# Altium PCB Samp1.PcbDoc
Units mil, origin at the board's own origin, x right, y up, seen from the top; angles counter-clockwise.
Board outline 1727.31 x 415.03 mil, 2 copper layers (Top Layer, Bottom Layer); 14 components, 10 nets, 36 pads, 0 vias.
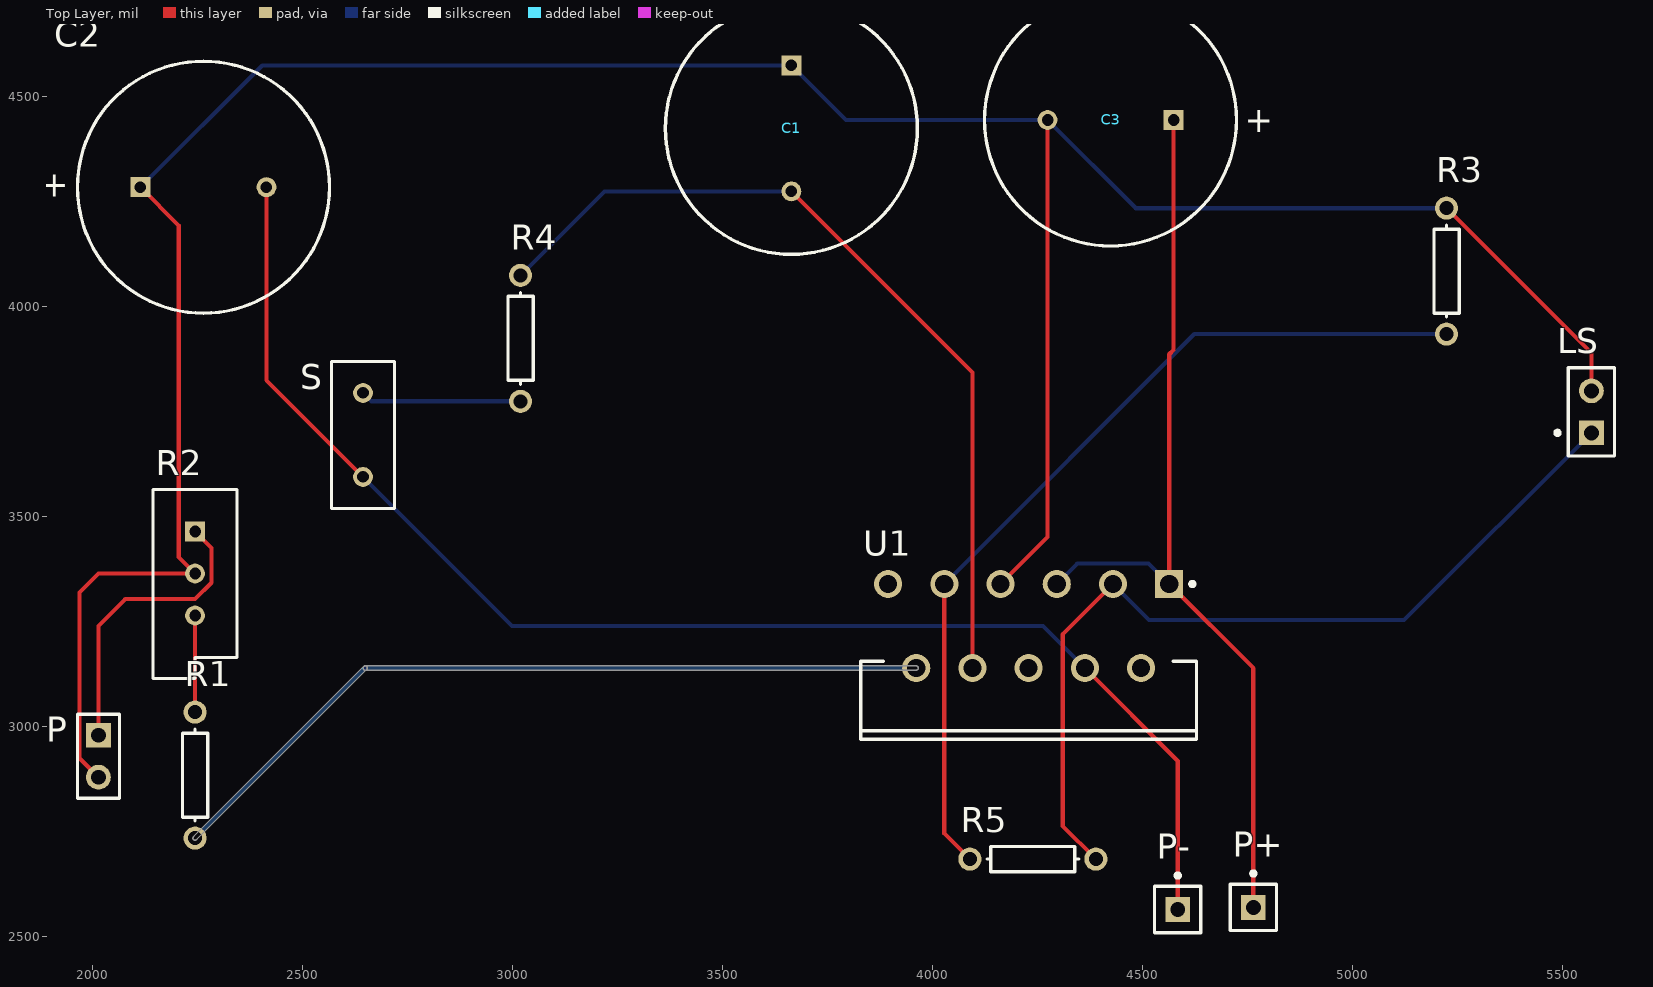
[diagram p0: Top Layer view]
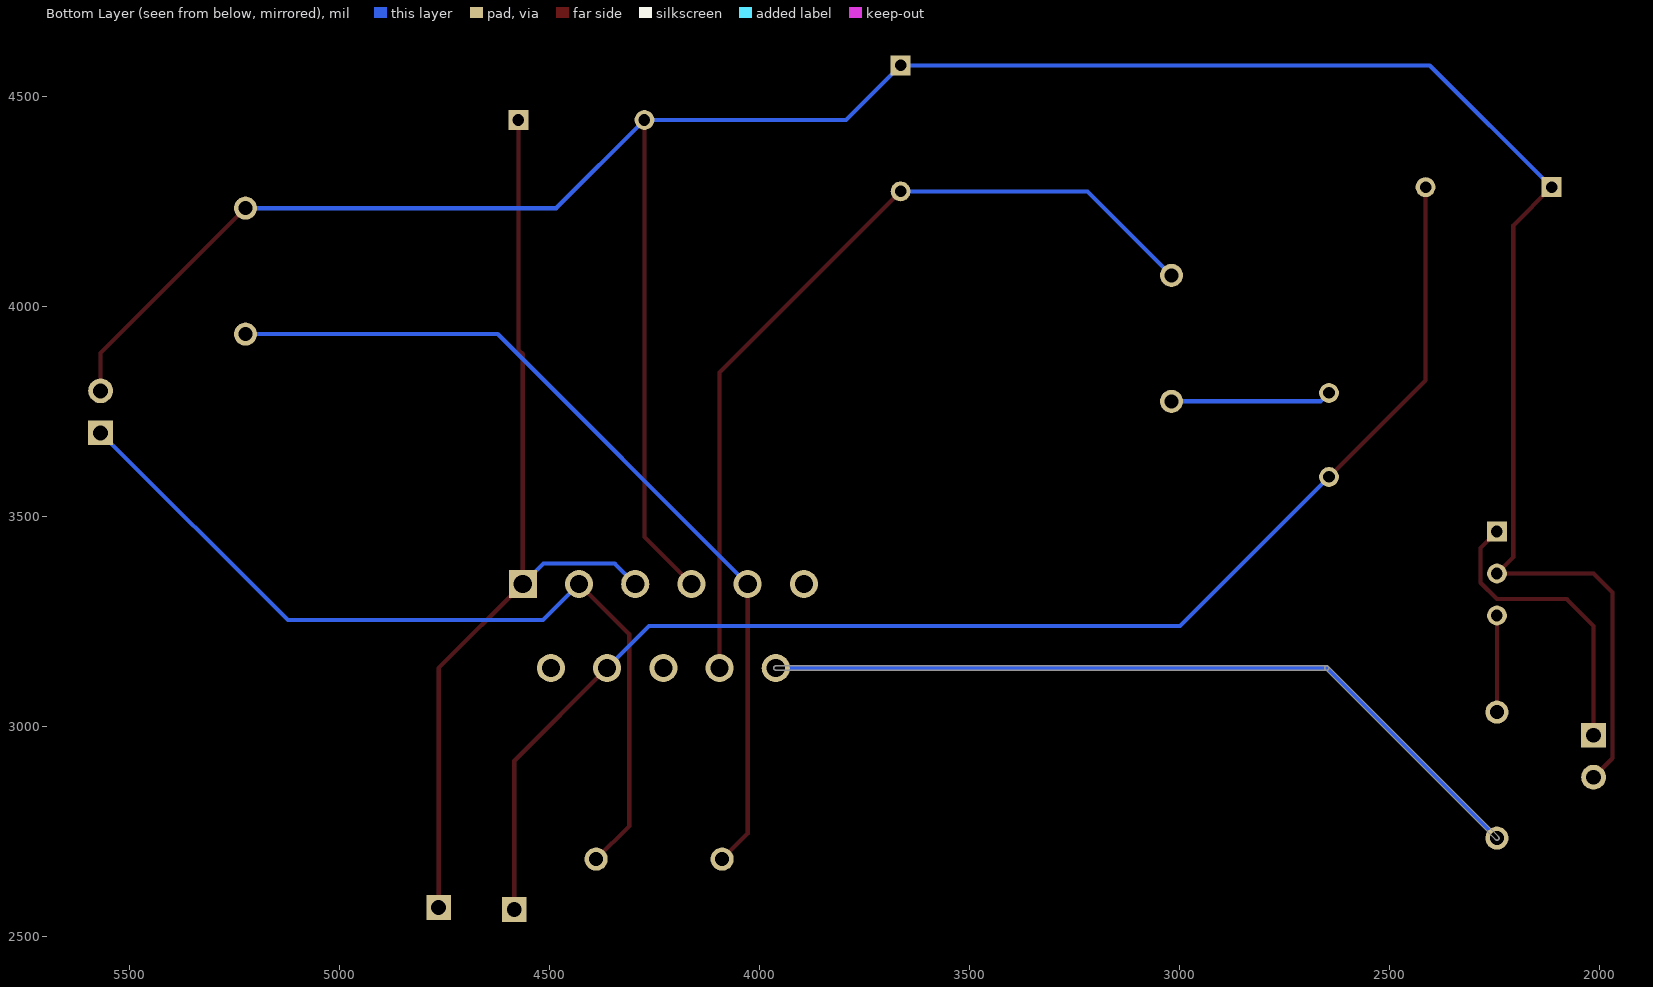
[diagram p1: Bottom Layer view, seen from below]

## Layer stack, top to bottom
Top Solder: solder mask 0.4, Solder Resist, Dk 3.5
Top Layer: signal copper 1.4
Dielectric 1: dielectric 12.6, FR-4, Dk 4.8
Bottom Layer: signal copper 1.4
Bottom Solder: solder mask 0.4, Solder Resist, Dk 3.5

## Board outline
2248.55,2731.45 cw(c2245,2735) 2241.45,2738.55 2646.45,3143.55 2646.44,3143.53 cw(c2650,3140) 2650,3145.01 3962.28,3145.01 cw(c3962.28,3140) 3967.3,3140 cw(c3962.28,3140) 3962.28,3134.99 2650,3134.99 cw(c2650,3140) 2646.44,3143.53 2650,3145.01 cw(c2650,3140) 2655.01,3140 cw(c2650,3140) 2653.55,3136.45

## Design rules (kind name [scope] priority, off if disabled: settings)
Clearance [All] p1: gap=10
PolygonConnect [All] p1: connectstyle=Relief reliefconductorwidth=10 reliefentries=4 polygonreliefangle="90 Angle" airgapwidth=10
RoomDefinition Amp1 [InComponentClass('Amp1')] p1: confinementstyle=ConfineIn formatcopy=TRUE lockcomponents=FALSE outline 1955,2525 5700,2525 5700,4785 1955,4785
RoutingVias [All] p1: holewidth=28 width=50 viastyle="Through Hole" minholewidth=28 minwidth=50 maxholewidth=28 maxwidth=50
SolderMaskExpansion [All] p1: expansion=4
Width [All] p1: maxlimit=10 minlimit=10 preferedwidth=10
30 further rules are at their usual default settings.

## Components (designator, comment, footprint, x,y, rotation, side; value= is the part's Value field where it differs from the comment)
C1 "" RB7.6-15 3665,4425 r90 top
C2 "" RB7.6-15 2265,4285 r180 top
C3 "" RB7.6-15 4425,4445 r0 top
LS "Speaker" PIN2 5570,3700 r90 top
P "Header 2" HDR1X2 2015,2980 r270 top
P+ "+28V" PIN1 4765,2570 r0 top
P- "-28V" PIN1 4585,2565 r0 top
R1 "" AXIAL-0.3 2245,2885 r270 top
R2 "" VR5 2245,3365 r270 top
R3 "" AXIAL-0.3 5225,4085 r270 top
R4 "" AXIAL-0.3 3020,3925 r90 top
R5 "" AXIAL-0.3 4240,2685 r0 top
S "Switch" RAD-0.2 2645,3695 r90 top
U1 "LM3886TF" TF11B 4230,3240 r180 top

## Footprints (in the part's own frame and the unit in brackets; to place one, negate y for a bottom-side part, rotate by r counter-clockwise, add the part's x,y. Pads: shape width x height; smd on the part's side, far side on the other; paste and mask are expansions set on the pad)
AXIAL-0.3 [mm] "Axial Device, Thru-Hole; 2 Leads; 0.3 in Pin Spacing"
  round 1.4 hole 0.85: 1(-3.81,0) 2(3.81,0)
  silkscreen extent -2.77,-0.76 2.77,0.76
HDR1X2 [mm] "Connector; Header; 2 Position"
  rect 1.5x1.5 hole 0.9: 1(0,0)
  round 1.5 hole 0.9: 2(2.54,0)
  silkscreen extent -1.27,-1.27 3.81,1.27
PIN1 [mm] "Connector; Plug"
  rect 1.5x1.5 hole 0.9: 1(0,0)
  silkscreen extent -1.4,-1.4 1.4,2.17
PIN2 [mm] "Photosensitive Diode; 2 Leads"
  rect 1.5x1.5 hole 0.9: 1(0,0)
  round 1.5 hole 0.9: 2(2.54,0)
  silkscreen extent -1.4,-1.4 3.94,2.17
RAD-0.2 [mm] "Radial Cap, Thru-Hole; 2 Leads; 0.2 in Pin Spacing"
  round 1.2 hole 0.7: 1(-2.54,0) 2(2.54,0)
  silkscreen extent -4.44,-1.91 4.44,1.91
RB7.6-15 [mm] "Polarized Capacitor (Radial); 2 Leads"
  rect 1.2x1.2 hole 0.7: 1(3.81,0)
  round 1.2 hole 0.7: 2(-3.81,0)
  silkscreen extent -7.62,-7.62 7.62,7.62
TF11B [mm] "TO, Thru-Hole, Vertical, Heatsink Mounted; 11 Bent Staggered Leads; Body 20x10.6x4.5mm, Pitch 1.7 mm"
  rect 1.7x1.7 hole 1.1: 1(-8.5,-2.54)
  round 1.7 hole 1.1: 2(-6.8,2.54) 3(-5.1,-2.54) 4(-3.4,2.54) 5(-1.7,-2.54) 6(0,2.54) 7(1.7,-2.54) 8(3.4,2.54) 9(5.1,-2.54) 10(6.8,2.54) 11(8.5,-2.54)
  silkscreen extent -10.15,-2.66 10.15,6.84, body extent -10.15,2.14 10.15,6.84, height 23
VR5 [mm] "Thru-Hole; 3 Leads"
  rect 1.2x1.2 hole 0.7: 1(-2.54,0)
  round 1.2 hole 0.7: 2(0,0) 3(2.54,0)
  silkscreen extent -5.08,-2.54 6.35,2.54

## Part data
C1 C2 C3: library part "Cap Pol1", "Polarized Capacitor (Radial)"
LS: "Loudspeaker"
P: "Header, 2-Pin"
P+ P-: library part Plug, "Plug"
R1 R3 R4 R5: library part Res1, "Resistor"
R2: library part RPot, "Potentiometer"
S: library part Jumper, "Jumper Wire"
U1: "High-Performance 68W Audio Power Amplifier with Mute, 11-pin Isolated TO220"

## Nets (pads, with @x,y where several pads share a name; then routed paths per layer and width w, separated by ;. In a path a pad name is that pad's centre, name@x,y a point inside that pad or via, vN(x,y) a via of type N, cw(c..) or ccw(c..) an arc to the next point about the centre after c; other vN are vias at no path point)
GND: C1.1 C2.1 C3.2 LS.2 P.2 R2.2 R3.1 U1.7 | length 6826.3
  Top Layer w10: P.2 1970,2925 1970,3320 2015,3365 R2.2 2206,3404 2206,4194 C2.1 ; U1.7 4275,3451.93 C3.2 ; R3.1 5570,3890 LS.2
  Bottom Layer w10: C2.1 2405,4575 C1.1 3795,4445 C3.2 4485,4235 R3.1
NetC1_2: C1.2 R4.2 U1.8 | length 2041.4
  Top Layer w10: C1.2 4096.14,3843.86 U1.8
  Bottom Layer w10: R4.2 3220,4275 C1.2
NetC2_2: C2.2 P-.1 S.1 U1.4 | length 3359.2
  Top Layer w10: C2.2 2415,3825 S.1 ; U1.4 4585,2918.86 P-.1
  Bottom Layer w10: S.1 3000,3240 4263.86,3240 U1.4
NetC3_1: C3.1 P+.1 U1.1 U1.5 | length 2270.6
  Top Layer w10: C3.1 4575,3897.35 4564.65,3887 U1.1 4765,3139.65 P+.1
  Bottom Layer w10: U1.5 4345.93,3389 4515.65,3389 U1.1
NetLS_1: LS.1 R5.2 U1.3 | length 2096.9
  Top Layer w10: R5.2 4311,2764 4311,3220.21 U1.3
  Bottom Layer w10: U1.3 4516.79,3254 5124,3254 LS.1
NetP_1: P.1 R2.1 | length 709.8
  Top Layer w10: P.1 2015,3240 2079,3304 2245,3304 2284,3343 2284,3426 R2.1
NetR1_1: R1.1 R2.3 | length 230
  Top Layer w10: R1.1 R2.3
NetR1_2: R1.2 U1.10 | length 1885
  Bottom Layer w10: R1.2 2650,3140 U1.10
NetR3_2: R3.2 R5.1 U1.9 | length 2122.4
  Top Layer w10: U1.9 4029.21,2745.79 R5.1
  Bottom Layer w10: U1.9 4624.21,3935 R3.2
NetR4_1: R4.1 S.2 | length 383.3
  Bottom Layer w10: S.2 2665,3775 R4.1
pads on no net: U1.2 U1.6 U1.11

## Text inside footprints (layer, text, board x,y; h text height)
C1: Top Overlay "+" at 3694.01,4745.15 h59.06 r90
C2: Top Overlay "+" at 1944.85,4314.01 h59.06 r180
C3: Top Overlay "+" at 4745.15,4415.99 h59.06